# Altium PCB PSU-PCB.PcbDoc
Units mm, origin at the board's own origin, x right, y up, seen from the top; angles counter-clockwise.
Board outline 99.57 x 99.69 mm, 2 copper layers (Top Layer, Bottom Layer); 57 components, 20 nets, 123 pads, 0 vias.
Unrouted connection lines stored in the file: 95.
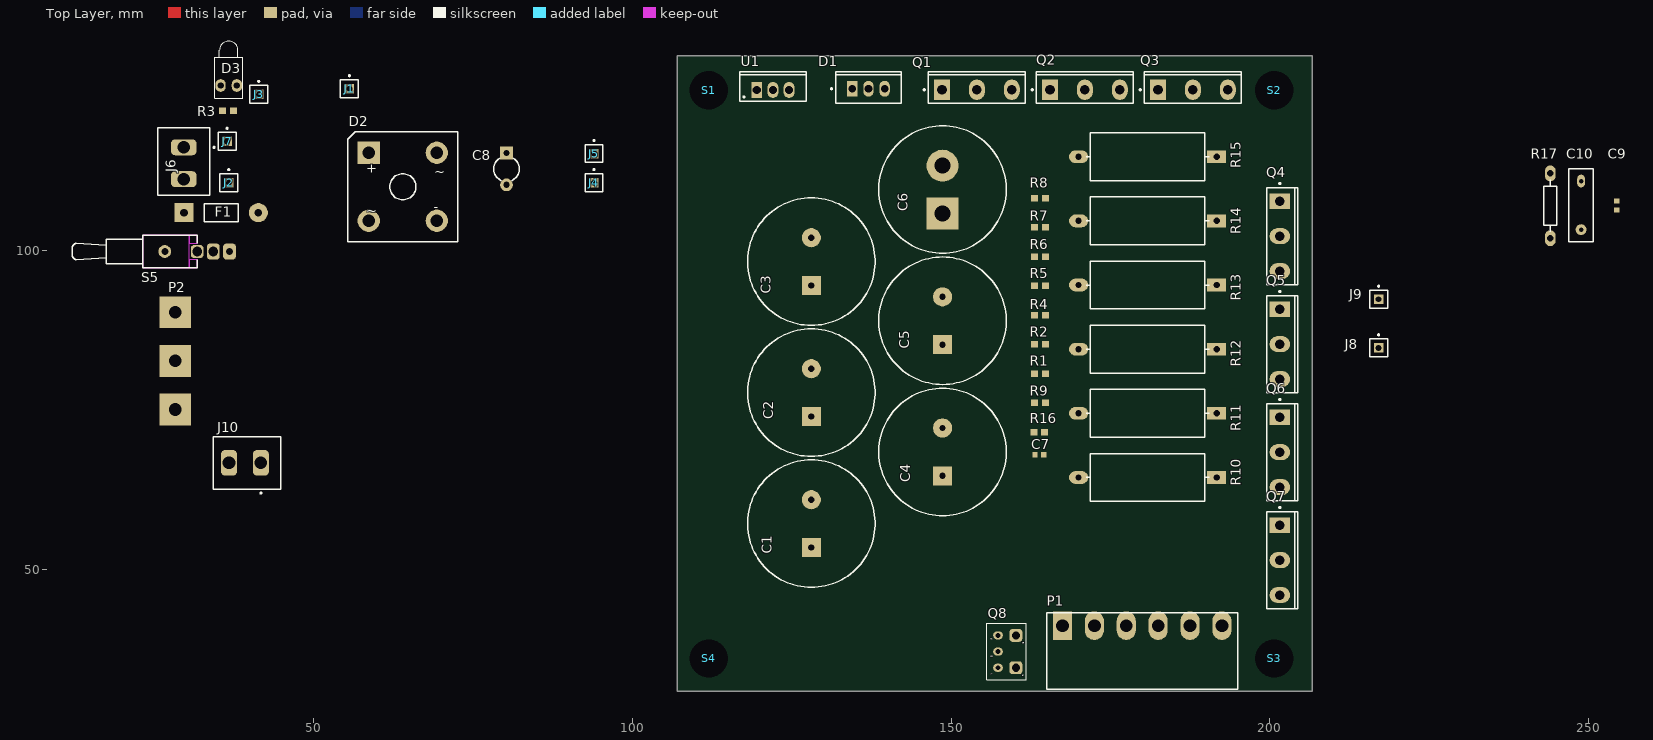
[diagram p0: Top Layer view]
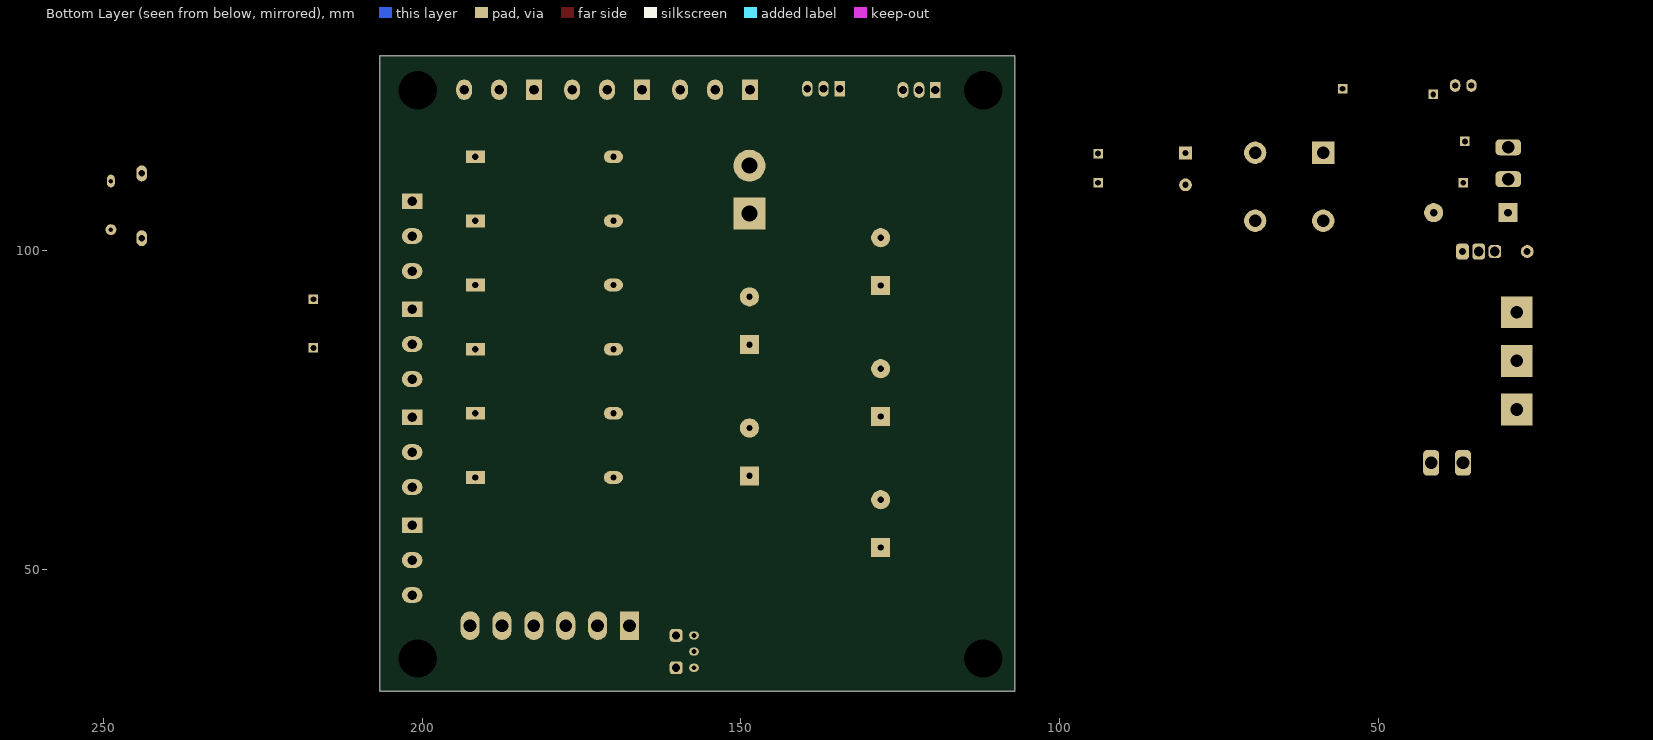
[diagram p1: Bottom Layer view, seen from below]

## Layer stack, top to bottom
Top Solder: solder mask 0.0102, Solder Resist, Dk 3.5
Top Layer: signal copper 0.0356
Dielectric 1: dielectric 0.32, FR-4, Dk 4.8
Bottom Layer: signal copper 0.0356
Bottom Solder: solder mask 0.0102, Solder Resist, Dk 3.5

## Board outline
107.061,30.861 206.629,30.861 206.629,130.556 107.061,130.556

## Design rules (kind name [scope] priority, off if disabled: settings)
Clearance [All] p1: gap=0.254 ignorepadtopadclearanceinfootprint=FALSE except(0: Arc-Hole Track-Hole SMDPad-Hole THPad-Hole Via-Hole Fill-Hole Poly-Hole Region-Hole Text-Hole)
ComponentClearance [All] p1: gap=0.254 collisioncheckmode=3 verticalgap=2540 showdistances=FALSE
Height [All] p1: minheight=0 maxheight=50 prefheight=12.7
HoleSize [All] p1: absolutevalues=TRUE maxlimit=10 minlimit=0.025 maxpercent=80.000 minpercent=20.000
PolygonConnect [All] p1: connectstyle=Relief reliefconductorwidth=0.254 reliefentries=4 polygonreliefangle="90 Angle" airgapwidth=0.254
RoomDefinition PSU-schem [InComponentClass('PSU-schem')] p1 off: confinementstyle=ConfineIn formatcopy=TRUE lockcomponents=FALSE outline 22.606,43.434 211.201,43.434 211.201,130.175 22.606,130.175
RoutingVias [All] p1: holewidth=0.711 width=1.27 viastyle="Through Hole" minholewidth=0.711 minwidth=1.27 maxholewidth=0.711 maxwidth=1.27
SolderMaskExpansion [All] p1: expansion=0.102 istentingtop=FALSE
Width [All] p1: maxlimit=0.254 minlimit=0.254 preferedwidth=0.254
27 further rules are at their usual default settings.

## Components (designator, comment, footprint, x,y, rotation, side; value= is the part's Value field where it differs from the comment)
C1 "Cap Pol2" "CAP 20mm diameter, 7.6mm pitch"#1 128.076,57.15 r90 top value=100pF
C2 "Cap Pol2" "CAP 20mm diameter, 7.6mm pitch"#1 128.076,77.694 r90 top value=100pF
C3 "Cap Pol2" "CAP 20mm diameter, 7.6mm pitch"#1 128.076,98.238 r90 top value=100pF
C4 "Cap Pol2" "CAP 20mm diameter, 7.6mm pitch"#1 148.65,68.386 r90 top value=100pF
C5 "Cap Pol2" "CAP 20mm diameter, 7.6mm pitch"#1 148.65,88.963 r90 top value=100pF
C6 "Cap Pol2" "CAP 20mm diameter, 7.6mm pitch"#2 148.65,109.541 r90 top value=100pF
C7 "Cap" "C 0603 / 1608" 163.83,67.945 r180 top value=100nF
C8 "Cap Pol3" CAPR5-4X5 80.264,112.776 r270 top value=100uF
C9 "Cap" "C 0603 / 1608" 254.381,107.061 r90 top value=100nF
C10 "Cap Pol3" RAD-0.3 248.793,107.061 r270 top value=470uF
D1 "2N6403G" ONSC-TO-220-3-221A-07 137.033,125.349 r90 top
D2 "Bridge2" D-46_6A 64.007,109.981 r0 top
D3 "LED1" LED-1 36.703,125.857 r90 top
F1 "250V 12A" PIN-W2/E2.8 35.523,105.918 r0 top
J1 "TP" PIN1 55.626,125.349 r0 top
J2 "TP" PIN1 36.703,110.617 r0 top
J3 "TP" PIN1 41.402,124.46 r0 top
J4 "TP" PIN1 93.98,110.617 r0 top
J5 "TP" PIN1 93.98,115.189 r0 top
J6 "15V T- Secondary" TECO-282836-2_V 29.648,113.665 r270 top
J7 "TP" PIN1 36.449,117.094 r0 top
J8 "TP" PIN1 217.043,84.709 r0 top
J9 "TP" PIN1 217.043,92.329 r0 top
J10 "230VAC T- Primary" TECO-282836-2_V 39.243,66.675 r180 top
P1 "Vout" 691312710006 179.966,37.148 r0 top
P2 "Plug AC Male" "Screw terminal 3-pin 7.62mm" 28.321,82.677 r270 top
Q1 "TIP35C" ONSC-SOT-93_TO-218-3-340D-02 154.041,125.194 r90 top
Q2 "TIP35C" ONSC-SOT-93_TO-218-3-340D-02 170.979,125.194 r90 top
Q3 "TIP35C" ONSC-SOT-93_TO-218-3-340D-02 187.916,125.194 r90 top
Q4 "TIP35C" ONSC-SOT-93_TO-218-3-340D-02 201.549,102.233 r0 top
Q5 "TIP35C" ONSC-SOT-93_TO-218-3-340D-02 201.549,85.296 r0 top
Q6 "TIP35C" ONSC-SOT-93_TO-218-3-340D-02 201.549,68.358 r0 top
Q7 "TIP35C" ONSC-SOT-93_TO-218-3-340D-02 201.549,51.421 r0 top
Q8 "VA_Meter" VA_Meter 157.353,37.084 r90 top
R1 "Res3" 3-0603 163.957,80.677 r180 top value=680R
R2 "Res3" 3-0603 163.957,85.265 r0 top value=150R
R3 "Res3" 3-0603 36.587,121.92 r0 top value=2.2K
R4 "Res3" 3-0603 163.957,89.852 r0 top value=150R
R5 "Res3" 3-0603 163.957,94.44 r0 top value=150R
R6 "Res3" 3-0603 163.957,99.028 r0 top value=150R
R7 "Res3" 3-0603 163.957,103.616 r0 top value=150R
R8 "Res3" 3-0603 163.957,108.204 r0 top value=150R
R9 "Res3" 3-0603 163.957,76.089 r0 top value=100R
R10 "0.15R" FP-AC05000003909JAC00-0 180.813,64.389 r180 top
R11 "0.15R" FP-AC05000003909JAC00-0 180.813,74.447 r180 top
R12 "0.15R" FP-AC05000003909JAC00-0 180.813,84.506 r180 top
R13 "0.15R" FP-AC05000003909JAC00-0 180.813,94.564 r180 top
R14 "0.15R" FP-AC05000003909JAC00-0 180.813,104.623 r180 top
R15 "0.15R" FP-AC05000003909JAC00-0 180.813,114.681 r180 top
R16 "Res3" 3-0603 163.83,71.501 r180 top value=1K
R17 "Res2" AXIAL-0.4 243.967,106.994 r90 top value=470R
S1 "Screw M4" "Screw M4" 112,125.095 r0 top
S2 "Screw M4" "Screw M4" 200.66,125.095 r0 top
S3 "Screw M4" "Screw M4" 200.66,36 r0 top
S4 "Screw M4" "Screw M4" 112,36 r0 top
S5 "SW-SPDT" TL36WW15050 31.75,99.822 r180 top
U1 "L7815ABV" TO220 122.047,125.164 r0 top

## Footprints (in the part's own frame and the unit in brackets; to place one, negate y for a bottom-side part, rotate by r counter-clockwise, add the part's x,y. Pads: shape width x height; smd on the part's side, far side on the other; paste and mask are expansions set on the pad)
3-0603 [mm] "Chip Resistor; Body 1.6 x 0.9 mm (LxW typ)"
  rect 1.1x1 smd: 1(-0.85,0) 2(0.85,0)
691312710006 [mm] "5.00mm - Open Horizhontal PCB Header - 06p"
  rect 3x4.5 hole 2: 1(-12.5,4)
  oval 3x4.5 hole 2: 2(-7.5,4) 3(-2.5,4) 4(2.5,4) 5(7.5,4) 6(12.5,4)
  silkscreen extent -15,-6 15,6, body extent -15,-6 15,6, height 8.55
AXIAL-0.4 [mm] "Axial Device, Thru-Hole; 2 Leads; 0.4 in Pin Spacing"
  oval 2.5x1.7 hole 1: 1(-5.08,0) 2(5.08,0)
  silkscreen extent -4.06,-1.02 4.06,1.02
"C 0603 / 1608" [mm] "Capacitor 0603 / 1608 (1.6 x 0.8 mm)"
  rect 0.8x0.9 smd: 1(-0.7,0) 2(0.7,0)
  body extent -0.8,-0.4 0.8,0.4, height 0.3
"CAP 20mm diameter, 7.6mm pitch"#1 [mm] "Capacitor; 2 Leads"
  rect 3x3 hole 1: 1(-3.75,0)
  round 3 hole 1: 2(3.75,0)
  silkscreen extent -10,-10 10,10
"CAP 20mm diameter, 7.6mm pitch"#2 [mm] "Capacitor; 2 Leads"
  rect 5x5 hole 2.5: 1(-3.75,0)
  round 5 hole 2.5: 2(3.75,0)
  silkscreen extent -10,-10 10,10
CAPR5-4X5 [mm] "Capacitor; 2 Leads"
  rect 2x2 hole 1: 1(-2.5,0)
  round 2 hole 1: 2(2.5,0)
  silkscreen extent -1.69,-2 1.82,2
D-46_6A [mm] "Bridge Rectifier; 4 Terminals; Body 16.8 x 16.8 mm (typ); Pitch 10.67 mm"
  rect 3.5x3.5 hole 2: 1(-5.335,5.335)
  round 3.5 hole 2: 2(-5.335,-5.335) 3(5.335,-5.335) 4(5.335,5.335)
  silkscreen extent -8.65,-8.65 8.65,8.65, body extent -8.65,-8.65 8.65,8.65, height 6.35
FP-AC05000003909JAC00-0 [mm]
  rect 3x2 hole 1 paste-1000 mask+0: 1(-10.83,0)
  oval 3x2 hole 1 paste-1000 mask+0: 2(10.83,0)
  silkscreen extent -9.65,-3.75 9.65,3.75, body extent -11.71,-3.85 11.71,3.85, height 0.25
LED-1 [mm] "LED; 2 Leads"
  oval 2x1.6 hole 1: 1(0,1.27) 2(0,-1.27)
  silkscreen extent -2,-2.2 6.95,2.2
ONSC-SOT-93_TO-218-3-340D-02 [mm] "FM, 3-Leads, Body 15.2x4.9mm, Pitch 5.475mm"
  rect 3.2x2.5 hole 1.5: 1(0,5.475)
  oval 3.2x2.5 hole 1.5: 2(0,0) 3(0,-5.475)
  silkscreen extent -2.08,-7.6 2.82,8.37, body extent -2.08,-7.6 2.82,7.6, height 22.35
ONSC-TO-220-3-221A-07 [mm] "FM, 3-Leads, Body 10.3x4.85mm, Pitch 2.54mm"
  rect 2.5x1.6 hole 1.2: 1(0,2.54)
  oval 2.5x1.6 hole 1.2: 2(0,0) 3(0,-2.54)
  silkscreen extent -2.23,-5.15 2.67,5.92, body extent -2.21,-5.15 2.64,5.15, height 19.68
PIN1 [mm] "Connector; Plug"
  rect 1.5x1.5 hole 0.9: 1(0,0)
  silkscreen extent -1.4,-1.4 1.4,2.17
PIN-W2/E2.8 [mm] "Thru-Hole; 2 Leads"
  rect 3x3 hole 1.2: 1(-5.825,0)
  round 3 hole 1.2: 2(5.825,0)
  silkscreen extent -2.65,-1.4 2.65,1.4
RAD-0.3 [mm] "Radial Cap, Thru-Hole; 2 Leads; 0.3 in Pin Spacing"
  oval 2x1.2 hole 0.7: 1(-3.81,0)
  round 1.7 hole 0.7: 2(3.81,0)
  silkscreen extent -5.71,-1.91 5.71,1.91
"Screw M4" [mm]
  round 0 hole 6: x(0,0)
"Screw terminal 3-pin 7.62mm" [mm]
  rect 5x5 hole 2: 1(-7.62,0) 2(0,0) 3(7.62,0)
TECO-282836-2_V [mm] "Female Header, Pitch 5mm, 1 x 2 Position, Height 10mm"
  rrect50% 2.5x4 hole 2: 1(-2.5,0) 2(2.5,0)
  silkscreen extent -5.6,-4.1 5,4.88, body extent -5.6,-4.1 5,4.1, height 10
TL36WW15050 [mm] "Switch; 4 Leads"
  rrect50% 2x2 hole 1.5: 1(0,0)
  rrect50% 2x2.5 hole 1.5: 2(-2.54,0)
  rrect50% 2x2.5 hole 1.1: 3(-5.08,0)
  round 2 hole 1.1: M(5.08,0)
  Top Layer keep-out region: 1.27,2.54 1.27,-2.54 8.509,-2.54 8.509,2.54
  Top Layer keep-out region: 0,2.54 0,1.27 1.27,1.27 1.27,2.54
  Top Layer keep-out region: 0,-1.27 0,-2.54 1.27,-2.54 1.27,-1.27
  silkscreen extent 0,-2.54 19.56,2.54
TO220 [mm] "TO, Thru-Hole, Vertical, Heatsink Mounted; 3 In-Line Leads; Pitch 2.54 mm"
  rect 1.7x2.5 hole 1.3: 1(-2.54,0)
  oval 1.7x2.5 hole 1.3: 2(0,0) 3(2.54,0)
  silkscreen extent -5.2,-1.75 5.2,2.85, body extent -5.25,-1.8 5.25,2.9, height 19.7
VA_Meter [mil]
  oval 50x60 hole 30: 1(-100,0) 2(0,0) 3(100,0)
  rrect50% 80x80 hole 50: 4(100,-110) 5(-100,-110)
  silkscreen extent -175,-175 175,70

## Part data
C1 C2 C3 C4 C5 C6: "Polarized Capacitor (Axial)", LatestRevisionDate=17-Jul-2002, LatestRevisionNote="Re-released for DXP Platform.", PackageDescription="Polarized Capacitor; 2 Leads", PackageReference=POLAR0.8, Published=8-Jun-2000, Publisher="Altium Limited"
C7 C9: "Capacitor", LatestRevisionDate=17-Jul-2002, LatestRevisionNote="Re-released for DXP Platform.", PackageDescription="Radial Cap, Thru-Hole; 2 Leads; 0.3 in Pin Spacing", PackageReference=RAD-0.3, Published=8-Jun-2000, Publisher="Altium Limited"
C8 C10: "Polarized Capacitor (Surface Mount)", LatestRevisionDate=29-May-2009, LatestRevisionNote="IPC-7351 Footprint Added.", PackageDescription="Chip Capacitor", PackageReference=C0805, Published=8-Jun-2000, Publisher="Altium Limited"
D1: library part CMP-1068-00092-1, "Silicon Controlled Rectifier, Reverse Blocking Thyristor, 3-Pin TO-220, Pb-Free, Bulk Box", Manufacturer="On Semiconductor", ComponentLink1Description="Manufacturer URL", ComponentLink1URL=http://www.onsemi.com/, ComponentLink2Description=Datasheet, ComponentLink2URL=http://www.onsemi.cn/pub_link/Collateral/2N6400-D.PDF, ComponentLink3Description="Package Specification", ComponentLink3URL=http://www.onsemi.com/pub_link/Collateral/221A-07.PDF, DatasheetVersion="Rev. 6", IT(RMS) Max (A)=16, ITSM Max (A)=160, Mounting Technology="Through Hole", PackageDescription="3-Pin Flange Mount, Vertical Straight Lead, Body 9.97 x 4.445 mm, Pitch 2.54 mm", PackageReference=TO-220-3-221A-07, PackageVersion="Rev. O, 07/2008", Packing="Bulk Box", PartNumber=2N6403G, RoHS=Pb-Free
D2: "Diode Bridge", LatestRevisionDate=17-Jul-2002, LatestRevisionNote="Re-released for DXP Platform.", PackageDescription="Bridge Rectifier; 4 Terminals; Body 16.8 x 16.8 mm (typ); Pitch 10.67 mm", PackageReference=D-46_6A, Published=24-Mar-1999, Publisher="Altium Limited"
D3: "Typical RED GaAs LED", LatestRevisionDate=08-Jul-2005, LatestRevisionNote="Mech Layer 1 removed.", PackageDescription="LED; 2 Leads", PackageReference=LED-1, Published=8-Jun-2000, Publisher="Altium Limited"
F1: library part "Fuse 2", "Fuse", LatestRevisionDate=17-Jul-2002, LatestRevisionNote="Re-released for DXP Platform.", PackageDescription="Thru-Hole; 2 Leads", PackageReference=PIN-W2/E2.8, Published=8-Jun-2000, Publisher="Altium Limited"
J1 J2 J3 J4 J5 J7 J8 J9: library part Socket, "Socket", LatestRevisionDate=17-Jul-2002, LatestRevisionNote="Re-released for DXP Platform.", Publisher="Altium Limited"
J6 J10: library part CMP-1684-00017-1, "Female Header, Pitch 5 mm, 1 x 2 Position, Height 10 mm, Tail Length 3.5 mm, Rohs, Bulk", Color=Green, Current=13.5A, Manufacturer="TE Connectivity", Package Description="Female Header, Pitch 5 mm, 1 x 2 Position, Height 10 mm, Tail Length 3.5 mm", Package Reference=THD, Standard Package=300, Voltage=300V, 3D Model=282836-2.pdf, Category=Connectors,Interconnects, Clamp Material - Plating=Brass-NickelPlated, Contact Material - Plating=Brass-TinPlated, Datasheet URL=http://www.te.com.cn/commerce/DocumentDelivery/DDEController?Action=showdoc&DocId=Catalog+Section%7F1308389_EUROSTYLE_TERMINAL_BLOCKS%7F0607%7Fpdf%7FEnglish%7FENG_CS_1308389_EUROSTYLE_TERMINAL_BLOCKS_0607.pdf%7F282836-2, Dynamic Catalog=BuchananSeries, Family=TerminalBlocks-WiretoBoard, Featured Product=EurostyleTerminalBlockConnectors, Features=Interlocking(Side), Housing Material=Polyamide(PA66),Nylon6/6, Manufacturer URL=http://www.te.com, Mating Orientation=HorizontalwithBoard, Mounting Type=ThroughHole, Number of Levels=1, Other Names="5ULV-02B / A98076", Packaging=Bulk, Pitch="0.197\"(5.00mm)", Positions Per Level=2, Product Training Modules=Wire-to-BoardEurostyleTerminalBlocks, RoHS Information=282836-2StatementofCompliance, Screw Material - Plating=Brass-NickelPlated, Screw Thread=M3, Series=Buchanan, Torque - Screw=0.68Nm(6Lb-In), Wire Gauge=16-30AWG, Wire Termination=Screw-RisingCageClamp
P1: library part CMP-1502-02044-1, "Serie 3127 - 5.00mm Open Horizontal PCB Header WR-TBL, 6 pin", Manufacturer="Wurth Elektronik", Operating Temperature=-40to105degC, Package Reference=691312710006, Datasheet URL=http://katalog.we-online.de/em/datasheet/6913127100xx.pdf, Gender=Male, Manufacturer URL=http://www.we-online.de, Mounting Technology=THT, Packaging=Box, Part Number=691312710006, Pin Number=6, Pitch=5.00mm, Publisher=WurthElektronik
P2: "IEC Mains Power Inlet, EN60 320-1 C14 Class I Cold Condition, PC Flange Rear Mount, Chassis Plug", MaximumRating="10A, 250V a.c. (UL & CSA 15A, 250V a.c.)", PackageDocument="ver.80, 15-Sep-2003", ComponentLink1Description="Manufacturer Link", ComponentLink1URL=http://www.bulgin.co.uk/, DatasheetDocument="ver.80, 15-Sep-2003", DrillSize="Corresponds to nominal value.", LatestRevisionDate=15-Jul-2004, LatestRevisionNote="Component Replaced.", MountingFixtures="Not drawn on schematic symbol.", Note="IEC Color Scheme employed for L, N and E.", PackageReference=PX0580/PC, PCB_Layout="Complies with manufacturer's recommendation.", Published=15-Jul-2004, Publisher="Altium Limited", Terminations="P.C. Spills"
Q1 Q2 Q3 Q4 Q5 Q6 Q7: library part CMP-1048-00995-1, "Complementary Silicon High-Power Transistor, 3-Pin SOT-93, Tube", Manufacturer="On Semiconductor", ComponentLink1Description="Manufacturer URL", ComponentLink1URL=http://www.onsemi.com/, ComponentLink2Description=Datasheet, ComponentLink2URL=http://www.onsemi.com/pub_link/Collateral/TIP35A-D.PDF, ComponentLink3Description="Package Specification", ComponentLink3URL=http://www.onsemi.com/pub_link/Collateral/TIP33C-D.PDF, DatasheetVersion="Rev. 6", fT Min (MHz)=3, IC Continuous (A)=25, Mounting Technology="Through Hole", PackageDescription="3-Pin Flange Mount, Vertical Straight Lead, Body 14.95 x 4.8 mm, Pitch 5.475 mm", PackageReference=SOT-93_TO-218-3-340D-02, PackageVersion="Rev. E", Packing=Tube, PartNumber=TIP35C, Polarity=NPN, RoHS=FALSE
Q8: "Digital V/A Meter"
R1: "Resistor", Manufacturer=Uniroyal, Manufacturer Part Number=0603WAJ0681T5E, Supplier Part Number 1=C25253, LatestRevisionDate=29-May-2009, LatestRevisionNote="IPC-7351 Footprint Added.", PackageDescription="Chip Resistor", PackageReference=J1-0603, Pricing 1="100=0.00170, 1000=0.00130, 3000=0.00120, 10000=0.00120, 50000=0.00120, 100000=0.00100, 100=0.00160, 1000=0.00120, 3000=0.00110, 10000=0.00110, 50000=0.00110, 100000=0.00100, 100=0.00840, 1000=0.00650, 3000=0.00580, 10000=0.00580, 50000=0.00580, 100000=0.00520, 100=0.00800, 1000=0.00620, 3000=0.00550, 10000=0.00550, 50000=0.00550, 100000=0.00490, 100=0.00110, 1000=0.00080, 3000=0.00070, 10000=0.00070, 50000=0.00070, 100000=0.00070, 100=0.00090, 1000=0.00070, 3000=0.00060, 10000=0.00060, 50000=0.00060, 100000=0.00060, 100=0.01010, 1000=0.00780, 3000=0.00700, 10000=0.00700, 50000=0.00700, 100000=0.00620, 100=0.14080, 1000=0.10830, 3000=0.09750, 10000=0.09750, 50000=0.09750, 100000=0.08660, 100=0.00530, 1000=0.00410, 3000=0.00370, 10000=0.00370, 50000=0.00370, 100000=0.00330, 100=0.09750, 1000=0.07500, 3000=0.06750, 10000=0.06750, 50000=0.06750, 100000=0.06000, 100=0.01090, 1000=0.00840, 3000=0.00750, 10000=0.00750, 50000=0.00750, 100000=0.00670, 100=0.00170, 1000=0.00130, 3000=0.00120, 10000=0.00120, 50000=0.00120, 100000=0.00110, 100=0.00130, 1000=0.00100, 3000=0.00090, 10000=0.00090, 50000=0.00090, 100000=0.00080 (AUD)", Published=8-Jun-2000, Publisher="Altium Limited", Stock 1=367400, Supplier 1=LCSC
R2 R3 R4 R5 R6 R7 R8 R9 R16 R17: "Resistor", Published=8-Jun-2000, Publisher="Altium Limited"
  R2 R3 R4 R5 R6 R7 R8 R9 R16: LatestRevisionDate=29-May-2009, LatestRevisionNote="IPC-7351 Footprint Added.", PackageDescription="Chip Resistor", PackageReference=J1-0603
  R17: LatestRevisionDate=17-Jul-2002, LatestRevisionNote="Re-released for DXP Platform.", PackageDescription="Axial Device, Thru-Hole; 2 Leads; 0.4 in Pin Spacing", PackageReference=AXIAL-0.4
R10 R11 R12 R13 R14 R15: library part CMP-02408-000001-1, "RES 0.15 OHM 5W 5%", Power Rating=5W, Resistance=0.15Ω, Category=Res, ComponentLink2Description=Datasheet, ComponentLink2URL=http://www.vishay.com/docs/28730/acac-at.pdf, Device Class L1="Passive Components", Device Class L2=Resistors, Device Class L3="Through-Hole Resistors"
S5: "SPDT Subminiature Toggle Switch, Right Angle Mounting, Vertical Actuation", ComponentLink1Description="Manufacturer Link", ComponentLink1URL=http://www.apem.com, DatasheetVersion=05-Dec-2000, LatestRevisionDate=17-Dec-2003, LatestRevisionNote="Schematic revised, PCB Footprint replaced.", PackageDescription="Switch; 4 Leads", PackageReference=TL36WW15050, Published=24-Mar-1999, Publisher="Altium Limited"
U1: library part CMP-0244-00468-1, "Positive Voltage Regulator, 15V, 3-Pin TO-220", ComponentLink1Description="Manufacturer URL", ComponentLink1URL=http://www.st.com, ComponentLink2Description=Datasheet, ComponentLink2URL=http://www.st.com/internet/com/TECHNICAL_RESOURCES/TECHNICAL_LITERATURE/DATASHEET/CD00000444.pdf, ComponentLink3Description="Package Specification", ComponentLink3URL=http://www.st.com/internet/com/TECHNICAL_RESOURCES/TECHNICAL_LITERATURE/PACKAGE_INFORMATION/CD00004649.pdf, DatasheetVersion=16/11/2011, PackageDescription="TO, Thru-Hole, Vertical, Heatsink Mounted; 3 In-Line Leads; Pitch 2.54 mm", PackageReference=TO220, PackageVersion=ver3.0

## Nets (pads, with @x,y where several pads share a name; then routed paths per layer and width w, separated by ;. In a path a pad name is that pad's centre, name@x,y a point inside that pad or via, vN(x,y) a via of type N, cw(c..) or ccw(c..) an arc to the next point about the centre after c; other vN are vias at no path point)
GND: J8.1 P1.1 P1.2 P1.3 Q8.5
GND-A: C1.2 C2.2 C3.2 C4.2 C5.2 C6.2 C7.1 C9.1 C10.2 D2.3 D3.2 Q8.4 R17.1 U1.2
NetC1_1: C1.1 C2.1 C3.1 C4.1 C5.1 C6.1 C7.2 D2.1 J3.1 Q1.2 Q2.2 Q3.2 Q4.2 Q5.2 Q6.2 Q7.2 R3.2 U1.1
NetC8_1: C8.1 D1.3 J5.1 R9.2 R16.2
NetD1_2: D1.2 J1.1 J4.1 Q1.1 R1.2 U1.3
NetD2_2: D2.2 J2.1 J6.2
NetD2_4: D2.4 J6.1 J7.1
NetD3_1: D3.1 R3.1
NetF1_1: F1.1 S5.1
NetF1_2: F1.2 J10.1
NetJ10_2: J10.2 P2.2
NetP2_1: P2.1 S5.2
NetQ1_3: Q1.3 Q2.1 Q3.1 Q4.1 Q5.1 Q6.1 Q7.1 R1.1 R2.1 R4.1 R5.1 R6.1 R7.1 R8.1
NetQ2_3: Q2.3 R2.2 R9.1 R10.2
NetQ3_3: Q3.3 R4.2 R11.2
NetQ4_3: Q4.3 R5.2 R12.2
NetQ5_3: Q5.3 R6.2 R13.2
NetQ6_3: Q6.3 R7.2 R14.2
NetQ7_3: Q7.3 R8.2 R15.2
Vout: C8.2 C9.2 C10.1 D1.1 J9.1 P1.4 P1.5 P1.6 Q8.1 Q8.3 R10.1 R11.1 R12.1 R13.1 R14.1 R15.1 R16.1 R17.2
pads on no net: P2.3 Q8.2 S1.x S2.x S3.x S4.x S5.3 S5.M

## Silkscreen, mask and mechanical layers (free items; w line width, h text height)
Mechanical 1:
  lines w0.076: 107.023,30.861 ccw(c107.061,30.861) 107.061,30.823 ; 107.023,30.861 ccw(c107.061,30.861) 107.061,30.823 ; 107.023,30.861 107.023,130.556 ; 107.023,130.556 cw(c107.061,130.556) 107.061,130.594 ; 107.023,130.556 cw(c107.061,130.556) 107.061,130.594 ; 107.061,30.823 206.629,30.823 ; 107.061,130.594 206.629,130.594 ; 206.629,30.823 ccw(c206.629,30.861) 206.667,30.861 ; 206.629,30.823 ccw(c206.629,30.861) 206.667,30.861 ; 206.629,130.594 cw(c206.629,130.556) 206.667,130.556 ; 206.629,130.594 cw(c206.629,130.556) 206.667,130.556 ; 206.667,30.861 206.667,130.556 ; 107.099,30.899 107.099,130.518 206.591,130.518 206.591,30.899 107.099,30.899

## Dimensions
206.629,130.81 to 206.629,30.861 on Mechanical 13
107.061,130.556 to 206.629,130.556 on Mechanical 13

## Text inside footprints (layer, text, board x,y; h text height)
D2: Top Overlay "~" at 58.284,105.544 h1.5; Top Overlay "~" at 68.952,111.64 h1.5; Top Overlay "-" at 68.832,106.172 h1.5; Top Overlay "+" at 58.284,112.148 h1.5
Q8: Top Overlay "Y" at 156.515,33.477 h0.3 r90; Top Overlay "B" at 156.515,36.208 h0.3 r90; Top Overlay "R" at 156.515,38.938 h0.3 r90; Top Overlay "B" at 161.468,38.303 h0.3 r90; Top Overlay "R" at 161.468,33.223 h0.3 r90